# Altium PCB 20K Control Board V1.1.PcbDoc (part 11 of 24)
Units mm, origin at the board's own origin, x right, y up, seen from the top; angles counter-clockwise.
Board outline 132 x 260 mm, 4 copper layers (Top Layer, GND, VCC, Bottom Layer); 1384 components, 779 nets, 4515 pads, 1774 vias.
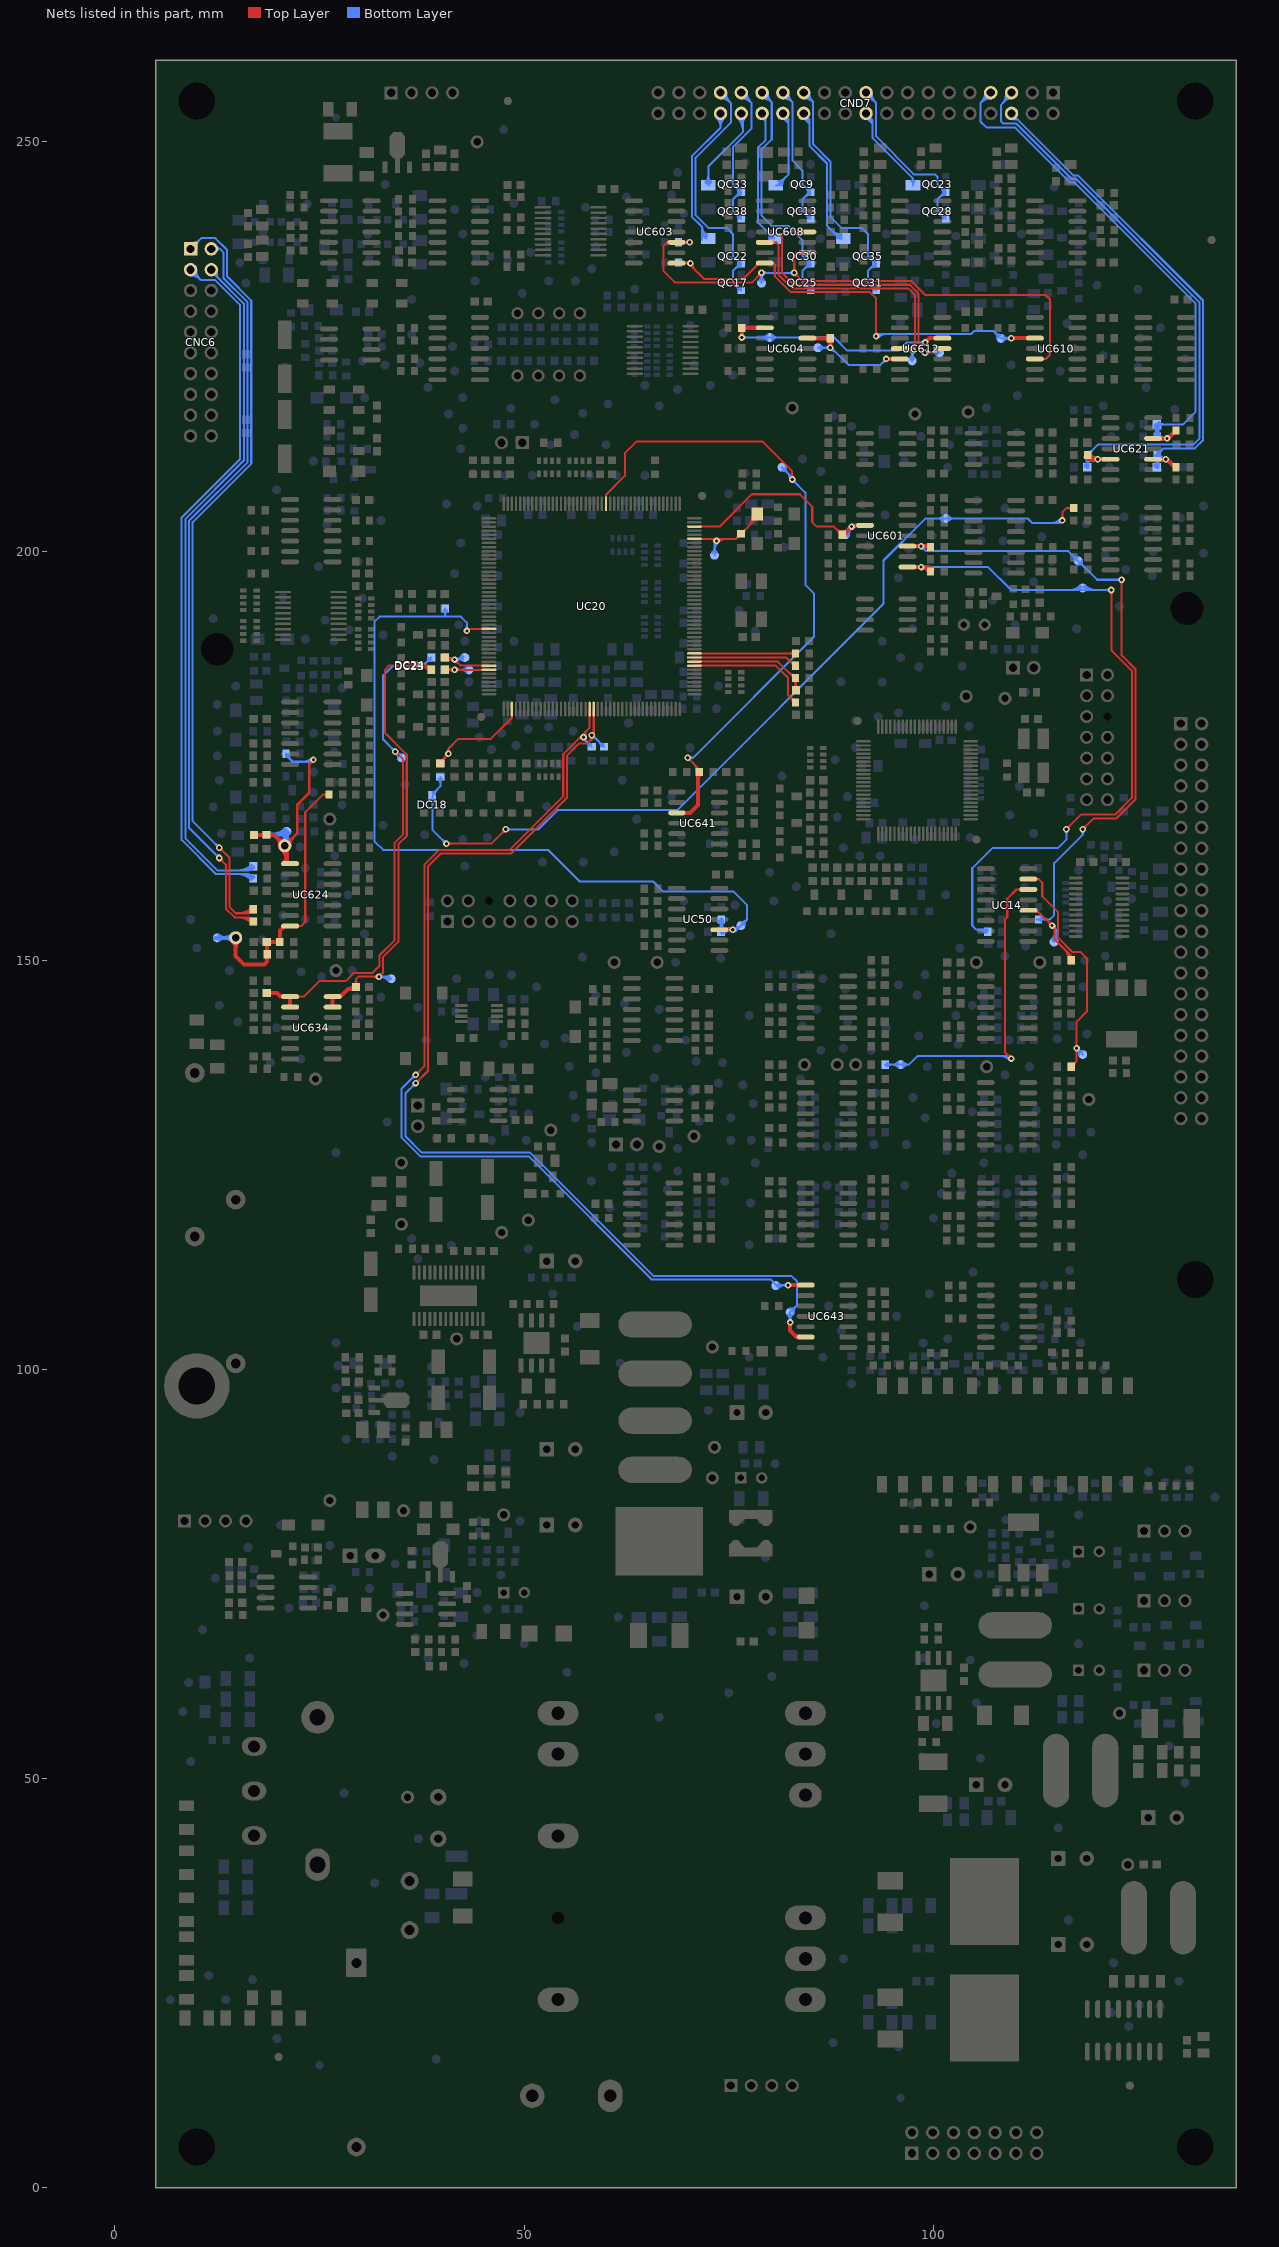
[diagram p13: the nets of this part, all layers, seen from the top]

## Via types
v1: diameter 0.8, hole 0.4, Top Layer to Bottom Layer, tented both sides, 1354 vias
v2: diameter 1.2, hole 0.7, Top Layer to Bottom Layer, 261 vias
v3: diameter 0.8, hole 0.4, Top Layer to Bottom Layer, 58 vias
v4: diameter 1.2, hole 0.7, Top Layer to Bottom Layer, tented top, 58 vias
v5: diameter 0.8, hole 0.4, Top Layer to Bottom Layer, tented top, 22 vias
v6: diameter 1.2, hole 0.7, Top Layer to Bottom Layer, tented both sides, 13 vias
v7: diameter 1.2, hole 0.7, Top Layer to Bottom Layer, tented bottom, 8 vias

## Nets (pads, with @x,y where several pads share a name; then routed paths per layer and width w, separated by ;. In a path a pad name is that pad's centre, name@x,y a point inside that pad or via, vN(x,y) a via of type N, cw(c..) or ccw(c..) an arc to the next point about the centre after c; other vN are vias at no path point) (continued)
INVBQ3_A: CND7.19 QC23.2 QC28.2 | length 30.5
  Bottom Layer w0.25: CND7.19@91.77,255.32 cw(c91.77,253.63) 92.965,254.825 cw(c94.16,256.02) CND7.19@92.47,256.02 ; CND7.19@91.77,255.57 cw(c91.77,254.484) 92.538,255.252 cw(c93.306,256.02) CND7.19@92.22,256.02 ; CND7.19@91.77,256.02 93,254.79 93,250.682 97.682,246 100.25,246 100.5,245.75 100.5,244.845 QC23.2@101.5,243.845 101.345,243.845 100.5,243 100.5,241.595 QC28.2@101.5,240.595 ; 100.668,243.168 cw(c101.5,242.337) QC23.2@101.5,243.513 ; 101.042,243.543 ccw(c100.74,243.845) 101.168,243.845 ccw(c100.366,243.845) 100.933,244.412 ccw(c101.5,244.979) QC23.2@101.5,244.177 ; QC23.2@101.095,243.595 cw(c101.5,243.19) QC23.2@101.5,243.763 ; QC28.2@101.168,240.595 ccw(c100.366,240.595) 100.933,241.162 ccw(c101.5,241.729) QC28.2@101.5,240.927
INVBQ3_K: CND7.20 RC376.2 | length 14.4
  Bottom Layer w0.25: CND7.20@91.77,253.029 92.55,252.249 ; CND7.20@91.77,253.279 92.55,252.499 ; CND7.20@91.77,253.344 CND7.20@91.77,253.48 92.55,252.7 92.55,252.499 ; RC376.2@97.267,245.171 ccw(c97.082,245.546) 97.5,245.546 ccw(c97.918,245.546) RC376.2@97.733,245.171 ; RC376.2@97.5,244.7 97.5,245.546 92.55,250.496 92.55,251.999 92.55,252.249 ; 92.55,252.249 92.55,252.499
INVBQ4_A: CND7.25 QC31.2 QC35.2 | length 38.6
  Bottom Layer w0.25: CND7.25@84.15,256.02 85.3,254.87 ; CND7.25@84.162,255.57 cw(c84.19,254.581) 84.889,255.281 cw(c85.589,255.98) CND7.25@84.6,256.008 ; CND7.25@84.169,255.32 cw(c84.212,253.782) 85.3,254.87 ; CND7.25@84.85,256.001 ccw(c86.388,255.958) 85.3,254.87 ; 92.168,234.418 cw(c93,233.587) QC35.2@93,234.763 ; 92.542,234.792 ccw(c92.24,235.095) 92.668,235.095 ccw(c91.866,235.095) 92.433,235.662 ccw(c93,236.229) QC35.2@93,235.427 ; QC35.2@92.595,234.845 cw(c93,234.44) QC35.2@93,235.013 ; QC31.2@92.668,231.845 ccw(c91.866,231.845) 92.433,232.412 ccw(c93,232.979) QC31.2@93,232.177 ; QC31.2@93,231.845 92,232.845 92,234.25 92.845,235.095 QC35.2@93,235.095 92,236.095 92,238.75 91.25,239.5 88.75,239.5 87.45,240.8 87.45,247.55 85.3,249.7 85.3,254.87
INVBQ4_K: CND7.26 RC387.2 | length 22.4
  Bottom Layer w0.25: CND7.26@84,253.099 84.85,252.249 ; CND7.26@84.15,253.199 84.85,252.499 ; CND7.26@84.15,253.48 84.85,252.78 84.85,252.499 ; 87.512,239.238 ccw(c88.75,240.475) RC387.2@88.75,238.725 ; 87.939,238.811 ccw(c88.75,239.622) RC387.2@88.75,238.475 ; 87.995,238.755 cw(c87.44,238.2) RC387.2@88.225,238.2 ; RC387.2@88.75,238.2 88.55,238.2 87,239.75 87,247.364 84.85,249.514 84.85,252.249 ; 84.85,252.249 84.85,252.499
INVC_S1: pad.ICT@79,232.75 RC308.1 UC603.10 UC608.9 UC610.5 | length 85.5
  Top Layer w0.25: 67.32,237.57 cw(c67.519,237.371) UC603.10@67.692,237.592 ; UC603.10@67.653,237.636 ccw(c67.48,237.525) 67.48,237.73 ; UC603.10@67.653,237.824 cw(c67.48,237.935) 67.48,237.73 ; UC603.10@69.524,237.606 cw(c69.822,237.308) 69.822,237.73 cw(c69.822,238.152) UC603.10@69.524,237.854 ; v1@70.036,237.536 ccw(c69.566,237.066) 69.566,237.73 ccw(c69.566,238.394) v1@70.036,237.924 ; v1(70.23,237.73) UC603.10@68.6,237.73 67.48,237.73 ; v1@78.725,234 cw(c78.061,234) 78.531,233.531 cw(c79,233.061) v1@79,233.725 ; v1(79,234) 77.8,232.8 68.45,232.8 67,234.25 67,237.25 67.48,237.73 ; v1@82.806,234.194 ccw(c82.336,234.664) 83,234.664 ccw(c83.664,234.664) v1@83.194,234.194 ; v1@83,233.725 cw(c83,233.061) 83.469,233.531 cw(c83.939,234) v1@83.275,234 ; UC608.9@83.676,236.336 ccw(c83.378,236.038) 83.378,236.46 ccw(c83.378,236.882) UC608.9@83.676,236.584 ; UC608.9@84.6,236.46 83.21,236.46 83,236.25 v1(83,234) 84,233 97.304,233 99.004,231.3 113.7,231.3 114.25,230.75 114.25,223.98 113.75,223.48 UC610.5@112.4,223.48 ; UC610.5@113.324,223.356 cw(c113.622,223.058) 113.622,223.48 cw(c113.622,223.902) UC610.5@113.324,223.604
  Bottom Layer w0.25: RC308.1@68.85,237.75 v1@70.21,237.75 ; RC308.1@69.08,237.52 cw(c69.635,236.965) 69.635,237.75 cw(c69.635,238.535) RC308.1@69.08,237.98 ; 69.518,237.75 cw(c69.518,237.018) v1@70.036,237.536 ; 69.614,237.75 ccw(c69.614,238.346) v1@70.036,237.924 ; pad.ICT@78.699,233.051 ccw(c77.974,233.776) 79,233.776 ccw(c80.026,233.776) pad.ICT@79.301,233.051 ; v1@78.806,233.806 cw(c78.336,233.336) 79,233.336 cw(c79.664,233.336) 79.194,233.806 cw(c79.664,233.336) 79.664,234 cw(c79.664,234.664) v1@79.194,234.194 ; pad.ICT@79,232.75 v1(79,234) v1(83,234) ; v1@82.806,233.806 ccw(c82.336,233.336) 82.336,234 ccw(c82.336,234.664) v1@82.806,234.194
INVC_S2: pad.ICT@85.9,224.85 RC318.1 UC604.12 UC612.5 | length 21.4
  Top Layer w0.5: UC604.12@84.62,226 RC318.1@87.4,226 v1(87.4,224.85) ; RC318.1@87.259,225.809 cw(c86.917,225.467) 87.4,225.467 cw(c87.883,225.467) RC318.1@87.541,225.809 ; RC318.1@87.259,225.859 ccw(c86.917,225.517) 86.917,226 ccw(c86.917,226.483) RC318.1@87.259,226.141 ; v1(94.25,223.48) UC612.5@95.9,223.48
  Bottom Layer w0.25: pad.ICT@85.9,224.85 v1(87.4,224.85) 87.525,224.85 89.625,222.75 93.52,222.75 v1(94.25,223.48) ; pad.ICT@86.201,224.549 cw(c86.926,223.824) 86.926,224.85 cw(c86.926,225.876) pad.ICT@86.201,225.151 ; v1@87.206,224.656 ccw(c86.736,224.186) 86.736,224.85 ccw(c86.736,225.514) v1@87.206,225.044 ; v1@87.4,224.575 cw(c87.4,223.609) 88.083,224.292 ; v1@87.675,224.85 ccw(c88.036,224.85) 87.781,224.594 ; v1@93.975,223.48 cw(c93.311,223.48) 93.781,223.011 cw(c94.25,222.541) v1@94.25,223.205
INVC_S3: pad.ICT@80,226.1 RC321.1 UC604.2 UC612.12 | length 36.5
  Top Layer w0.5: RC321.1@76.459,227.059 cw(c76.117,226.717) 76.6,226.717 cw(c77.083,226.717) RC321.1@76.741,227.059 ; v1(76.6,226.1) RC321.1@76.6,227.25 ; RC321.1@76.64,227.29 UC604.2@79.4,227.29 ; RC321.1@76.741,227.159 cw(c77.059,226.841) 77.059,227.29 ; RC321.1@76.741,227.441 ccw(c77.107,227.807) 77.107,227.29 ; v1(99,225.5) 99.52,226.02 UC612.12@101.1,226.02
  Bottom Layer w0.25: v1(76.6,226.1) 78.25,226.1 87.9,226.1 89.5,224.5 95.75,224.5 96.75,225.5 v1(99,225.5) ; v1@76.794,225.906 cw(c77.264,225.436) 77.264,226.1 cw(c77.264,226.764) v1@76.794,226.294 ; pad.ICT@79.699,225.799 ccw(c78.974,225.074) 78.974,226.1 ccw(c78.974,227.126) pad.ICT@79.699,226.401 ; pad.ICT@80.301,225.799 cw(c81.026,225.074) 81.026,226.1 cw(c81.026,227.126) pad.ICT@80.301,226.401 ; v1@98.806,225.306 ccw(c98.336,224.836) 98.336,225.5 ccw(c98.336,226.164) v1@98.806,225.694
INVC_S4: pad.ICT@108.25,226 RC315.1 UC603.8 UC608.7 UC610.3 | length 67.8
  Top Layer w0.25: UC603.8@68.6,235.19 v1(70.31,235.19) 70.31,234.94 72,233.25 76.75,233.25 UC608.7@78.69,235.19 ; UC603.8@69.524,235.066 cw(c69.822,234.768) 69.822,235.19 cw(c69.822,235.612) UC603.8@69.524,235.314 ; v1@70.116,234.996 ccw(c69.646,234.526) 69.646,235.19 ccw(c69.646,235.854) v1@70.116,235.384 ; v1@70.335,235.19 ccw(c70.999,235.19) 70.529,234.721 ; v1@70.585,235.19 ccw(c71.852,235.19) 70.956,234.294 ; 78.238,234.738 ccw(c77.785,235.19) UC608.7@78.425,235.19 ; UC608.7@79.4,235.19 80.428,235.19 80.618,235 80.618,233.609 82.577,231.65 92.25,231.65 93,230.9 v1(93,226.25) ; v1@92.806,226.444 ccw(c92.336,226.914) 93,226.914 ccw(c93.664,226.914) v1@93.194,226.444
  Top Layer w0.5: v1@109.5,226.02 UC610.3@112.4,226.02 ; v1@109.606,225.894 cw(c109.91,225.59) 109.91,226.02
  Bottom Layer w0.25: RC315.1@68.85,235.25 v1@70.25,235.25 ; RC315.1@69.08,235.02 cw(c69.635,234.465) 69.635,235.25 cw(c69.635,236.035) RC315.1@69.08,235.48 ; 69.501,235.25 cw(c69.501,234.381) v1@70.116,234.996 ; 69.791,235.25 ccw(c69.791,235.709) v1@70.116,235.384 ; v1(93,226.25) 93.275,226.525 104.625,226.525 105,226.9 107.35,226.9 pad.ICT@108.25,226 v1(109.5,226) ; v1@93.018,226.232 cw(c93.724,225.526) 93.724,226.525 ; v1@93.194,226.056 cw(c94.328,224.922) 94.328,226.525 ; pad.ICT@107.825,226 ccw(c106.799,226) 107.524,226.726 ccw(c108.25,227.451) pad.ICT@108.25,226.425 ; pad.ICT@108.551,225.699 cw(c109.276,224.974) 109.276,226 cw(c109.276,227.026) pad.ICT@108.551,226.301 ; v1@109.306,225.806 ccw(c108.836,225.336) 108.836,226 ccw(c108.836,226.664) v1@109.306,226.194
INVC_SS2: pad.ICT@97.4,223.25 UC608.5 UC612.4 | length 44.3
  Top Layer w0.25: UC608.5@79.4,237.73 80.77,237.73 81.068,237.432 81.068,233.795 81.55,233.314 ; UC608.5@80.324,237.606 cw(c80.622,237.308) 80.622,237.73 cw(c80.622,238.152) UC608.5@80.324,237.854 ; 81.2,233.664 81.55,233.314 ; UC612.4@95.9,224.75 UC612.4@96.75,224.75 ; UC612.4@96.638,224.708 ccw(c97.029,224.973) 97.029,224.5 ; UC612.4@96.724,224.577 cw(c96.772,224.222) 97.025,224.475 ; UC612.4@96.824,224.626 cw(c97.122,224.328) 97.122,224.75 cw(c97.122,225.172) UC612.4@96.824,224.874 ; UC612.4@96.845,224.848 ccw(c97.5,225.29) v1(97.5,224.5) ; UC612.4@96.875,224.75 ccw(c97.177,224.75) 96.963,224.537 ; 97.107,224.75 cw(c97.107,224.357) v1@97.477,224.491 ; v1@97.242,224.406 ccw(c96.75,224.227) UC612.4@96.75,224.75 ; v1@97.268,224.353 ccw(c97,224.183) 97,224.5 ; v1@97.268,224.647 cw(c97,224.817) 97,224.5 ; v1@97.52,224.515 cw(c97.837,224.766) 97.551,225.051 ; v1@97.716,224.67 cw(c98.059,224.941) 97.75,225.25 ; 81.55,233.314 82.764,232.1 96.932,232.1 97.75,231.282 97.75,225.25 ; UC612.4@96.75,224.75 97,224.5 ; UC612.4@96.75,224.75 97.25,224.75 97.5,225 ; 97,224.5 v1(97.5,224.5) ; v1(97.5,224.5) 97.75,224.75 97.75,225 ; 97.5,225 97.75,225.25 ; 97.5,225 97.75,225 ; 97.75,225 97.75,225.25
  Bottom Layer w0.25: pad.ICT@97.102,223.553 ccw(c96.175,224.5) v1(97.5,224.5) 97.5,223.35 pad.ICT@97.4,223.25 ; pad.ICT@97.277,223.375 ccw(c96.758,223.905) 97.5,223.905 ; v1@97.306,224.306 cw(c96.836,223.836) 97.5,223.836 cw(c98.164,223.836) v1@97.694,224.306 ; 97.5,224.035 ccw(c98.185,224.035) pad.ICT@97.701,223.551
INVC_SS3: pad.ICT@100.75,224.25 UC608.11 UC612.11 | length 43.3
  Top Layer w0.25: UC608.11@83.676,238.876 ccw(c83.378,238.578) 83.378,239 ccw(c83.378,239.422) UC608.11@83.676,239.124 ; UC608.11@84.6,239 82,239 81.518,238.518 81.518,233.982 82.95,232.55 97.118,232.55 98.2,231.468 98.2,225.025 v1(98.975,224.25) 99.75,224.25 100.25,224.75 UC612.11@101.1,224.75 ; v1@98.7,224.25 ccw(c98.036,224.25) 98.505,224.719 ccw(c98.975,225.189) v1@98.975,224.525 ; v1@99.169,224.056 cw(c99.639,223.586) 99.639,224.25 cw(c99.639,224.914) v1@99.169,224.444 ; 99.916,224.416 cw(c100.3,224.032) UC612.11@100.3,224.575 ; 100.037,224.537 ccw(c99.823,224.75) UC612.11@100.125,224.75
  Bottom Layer w0.25: v1(98.975,224.25) pad.ICT@100.75,224.25 ; v1@99.169,224.056 cw(c99.639,223.586) 99.639,224.25 cw(c99.639,224.914) v1@99.169,224.444 ; pad.ICT@100.449,223.949 ccw(c99.724,223.224) 99.724,224.25 ccw(c99.724,225.276) pad.ICT@100.449,224.551
INVCQ1_A: CND7.27 QC9.2 QC13.2 | length 26.1
  Bottom Layer w0.25: CND7.27@81.61,256.02 82.76,254.87 ; CND7.27@81.622,255.57 cw(c81.65,254.581) 82.349,255.281 cw(c83.049,255.98) CND7.27@82.06,256.008 ; CND7.27@81.629,255.32 cw(c81.672,253.782) 82.76,254.87 ; CND7.27@82.31,256.001 ccw(c83.848,255.958) 82.76,254.87 ; 84.168,243.168 cw(c85,242.337) QC9.2@85,243.513 ; 84.542,243.543 ccw(c84.24,243.845) 84.668,243.845 ccw(c83.866,243.845) 84.433,244.412 ccw(c85,244.979) QC9.2@85,244.177 ; QC9.2@84.595,243.595 cw(c85,243.19) QC9.2@85,243.763 ; QC13.2@84.668,240.595 ccw(c83.866,240.595) 84.433,241.162 ccw(c85,241.729) QC13.2@85,240.927 ; QC13.2@85,240.595 84,241.595 84,243 84.845,243.845 QC9.2@85,243.845 84,244.845 84,246.5 82.76,247.74 82.76,249.75 82.76,254.87
INVCQ1_K: CND7.28 RC357.2 | length 14.6
  Bottom Layer w0.25: RC357.2@80.75,244.7 80.95,244.7 82.31,246.06 82.31,251.999 82.31,252.249 ; RC357.2@81,245.225 ccw(c81,246.372) 81.811,245.561 ; RC357.2@81.275,244.7 cw(c82.06,244.7) RC357.2@81.505,245.255 ; RC357.2@81.525,244.7 cw(c82.913,244.7) 81.932,245.682 ; CND7.28@81.61,252.949 82.31,252.249 ; CND7.28@81.61,253.14 82.31,252.44 82.31,252.249 ; CND7.28@81.61,253.48 82.31,252.78 82.31,252.249
INVCQ2_A: CND7.33 QC17.2 QC22.2 | length 39.6
  Bottom Layer w0.25: CND7.33@73.99,255.32 cw(c73.99,253.63) 75.185,254.825 cw(c76.38,256.02) CND7.33@74.69,256.02 ; CND7.33@73.99,255.57 cw(c73.99,254.484) 74.758,255.252 cw(c75.526,256.02) CND7.33@74.44,256.02 ; CND7.33@73.99,256.02 75.25,254.76 75.25,252.364 70.95,248.064 70.95,241.05 72.5,239.5 74.75,239.5 75.5,238.75 75.5,236.095 QC22.2@76.5,235.095 76.345,235.095 75.5,234.25 75.5,232.845 QC17.2@76.5,231.845 ; 75.668,234.418 cw(c76.5,233.587) QC22.2@76.5,234.763 ; 76.042,234.792 ccw(c75.74,235.095) 76.168,235.095 ccw(c75.366,235.095) 75.933,235.662 ccw(c76.5,236.229) QC22.2@76.5,235.427 ; QC22.2@76.095,234.845 cw(c76.5,234.44) QC22.2@76.5,235.013 ; QC17.2@76.168,231.845 ccw(c75.366,231.845) 75.933,232.412 ccw(c76.5,232.979) QC17.2@76.5,232.177
INVCQ2_K: CND7.34 RC370.2 | length 25
  Bottom Layer w0.25: RC370.2@71.75,238 71.75,239.608 ; 71.75,238.921 ccw(c72.483,238.921) RC370.2@72.258,238.224 ; 71.75,239.265 ccw(c72.594,239.265) RC370.2@72.334,238.462 ; RC370.2@72.411,238.7 cw(c72.704,239.608) 71.75,239.608 ; CND7.34@73.495,252.985 cw(c72.3,251.79) 73.99,251.79 cw(c75.68,251.79) CND7.34@74.485,252.985 ; CND7.34@73.672,253.162 cw(c72.904,252.394) 73.99,252.394 cw(c75.076,252.394) CND7.34@74.308,253.162 ; CND7.34@73.99,253.48 73.99,251.74 70.496,248.246 70.496,240.862 71.75,239.608
INVCQ3_A: CND7.29 QC25.2 QC30.2 | length 38.3
  Bottom Layer w0.25: CND7.29@79.07,256.02 80.25,254.84 ; CND7.29@79.074,255.57 cw(c79.084,254.516) 79.829,255.261 cw(c80.574,256.006) CND7.29@79.52,256.016 ; CND7.29@79.076,255.32 cw(c79.091,253.681) 80.25,254.84 ; CND7.29@79.77,256.014 ccw(c81.409,255.999) 80.25,254.84 ; 84.168,234.418 cw(c85,233.587) QC30.2@85,234.763 ; 84.542,234.792 ccw(c84.24,235.095) 84.668,235.095 ccw(c83.866,235.095) 84.433,235.662 ccw(c85,236.229) QC30.2@85,235.427 ; QC30.2@84.595,234.845 cw(c85,234.44) QC30.2@85,235.013 ; QC25.2@84.668,231.845 ccw(c83.866,231.845) 84.433,232.412 ccw(c85,232.979) QC25.2@85,232.177 ; QC25.2@85,231.845 84,232.845 84,234.25 84.845,235.095 QC30.2@85,235.095 84,236.095 84,238 82.25,239.75 80.25,239.75 79.013,240.987 79.013,249.079 80.25,250.316 80.25,254.84
INVCQ3_K: CND7.30 RC378.2 | length 20.1
  Bottom Layer w0.25: CND7.30@79.07,252.93 79.5,252.5 ; CND7.30@79.07,253.48 79.5,253.05 79.5,252.499 ; 79.568,239.182 cw(c78.587,238.2) RC378.2@79.975,238.2 ; 79.689,239.061 ccw(c80.5,239.872) RC378.2@80.5,238.725 ; RC378.2@79.995,238.755 cw(c79.44,238.2) RC378.2@80.225,238.2 ; RC378.2@80.55,238.2 78.563,240.187 78.563,249.265 79.5,250.202 79.5,252.249 ; 79.5,252.249 79.5,252.5 ; 79.5,252.249 79.5,252.499
INVCQ4_A: CND7.31 QC33.2 QC38.2 | length 26.8
  Bottom Layer w0.25: 75.668,243.168 cw(c76.5,242.337) QC33.2@76.5,243.513 ; 76.042,243.542 ccw(c75.74,243.845) 76.168,243.845 ccw(c75.366,243.845) 75.933,244.412 ccw(c76.5,244.979) QC33.2@76.5,244.177 ; QC33.2@76.095,243.595 cw(c76.5,243.19) QC33.2@76.5,243.763 ; QC38.2@76.168,240.595 ccw(c75.366,240.595) 75.933,241.162 ccw(c76.5,241.729) QC38.2@76.5,240.927 ; QC38.2@76.5,240.595 75.5,241.595 75.5,243 76.345,243.845 QC33.2@76.5,243.845 75.5,244.845 75.5,249.364 77.75,251.614 77.75,254.8 CND7.31@76.53,256.02 ; CND7.31@76.53,255.32 cw(c76.53,253.63) 77.725,254.825 cw(c78.92,256.02) CND7.31@77.23,256.02 ; CND7.31@76.53,255.57 cw(c76.53,254.484) 77.298,255.252 cw(c78.066,256.02) CND7.31@76.98,256.02
INVCQ4_K: CND7.32 RC389.2 | length 18.7
  Bottom Layer w0.25: RC389.2@72.129,245.071 ccw(c71.233,245.967) 72.5,245.967 ccw(c73.767,245.967) RC389.2@72.871,245.071 ; RC389.2@72.306,244.894 ccw(c71.836,245.364) 72.5,245.364 ccw(c73.164,245.364) RC389.2@72.694,244.894 ; RC389.2@72.5,244.7 72.5,247 76.75,251.25 76.75,253.26 CND7.32@76.53,253.48 ; CND7.32@76.035,252.985 cw(c74.309,251.259) 76.75,251.259 ; CND7.32@76.212,253.162 cw(c74.912,251.862) 76.75,251.862 ; CND7.32@76.389,253.339 cw(c75.516,252.466) 76.75,252.466 ; 76.75,252.321 cw(c77.689,252.321) CND7.32@77.025,252.985
INVR_TEMP: CC281.1 CND7.5 RC479.1 RC481.1 UC621.5 | length 84.7
  Top Layer w0.5: RC479.1@118.6,211.535 ccw(c119.166,211.908) 119.166,211.23 ; RC479.1@118.85,211.5 cw(c118.85,210.896) RC479.1@119.277,211.323 ; RC479.1@118.85,211.75 119.37,211.23 v1(120.095,211.23) ; RC479.1@119.017,211.81 ccw(c120.095,212.522) v1(120.095,211.23) ; UC621.5@121.65,211.23 v1(120.095,211.23)
  Bottom Layer w0.25: 108.36,254.61 ccw(c107.156,255.814) CND7.5@108.853,255.96 ; 108.731,254.981 cw(c109.55,254.161) CND7.5@109.55,255.32 ; 108.74,254.99 ccw(c107.856,255.874) CND7.5@109.102,255.981 ; CND7.5@109.55,256.02 109.55,255.8 108.25,254.5 108.25,252.523 108.523,252.25 110.144,252.25 116.921,245.473 117.459,245.473 132.5,230.432 132.5,213.75 131.75,213 120.1,213 RC481.1@118.85,211.75 ; RC481.1@118.85,212.125 ccw(c118.85,213.03) 119.49,212.39 ; RC481.1@119.175,211.8 cw(c119.839,211.8) 119.369,212.269
  Bottom Layer w0.5: RC481.1@118.6,211.535 ccw(c119.166,211.908) 119.166,211.23 ; CC281.1@118.623,210.427 ccw(c118.076,210.974) 118.85,210.974 ; RC481.1@118.709,211.559 cw(c118.367,211.217) 118.85,211.217 cw(c119.333,211.217) RC481.1@118.991,211.559 ; CC281.1@118.85,210.3 RC481.1@118.85,211.75 ; 118.87,211.23 v1(120.095,211.23) cw(c120.095,212.522) RC481.1@119.017,211.81
INVS_TEMP: CC284.1 CND7.6 RC488.1 RC491.1 UC621.10 | length 69.2
  Top Layer w0.5: UC621.10@126.6,211.23 UC621.10@126.85,211.23 v1(128.405,211.23) ; v1@128.405,211.08 cw(c128.405,210.44) 128.857,210.893 ; v1@128.52,211.23 129.5,210.25 RC488.1@129.65,210.25 ; 128.967,210.783 ccw(c129.65,211.466) RC488.1@129.65,210.5
  Bottom Layer w0.25: CND7.6@109.55,253.314 CND7.6@109.55,253.48 ; RC491.1@127.35,211.75 128.15,212.55 131.936,212.55 132.95,213.564 132.95,230.618 117.645,245.923 117.107,245.923 110.39,252.64 ; RC491.1@127.35,212.125 ccw(c127.35,213.03) 127.99,212.39 ; RC491.1@127.675,211.8 cw(c128.339,211.8) 127.869,212.269 ; CND7.6@109.55,253.48 110.39,252.64 ; CND7.6@109.55,253.48 109.55,252.95 109.75,252.75 110.28,252.75 110.39,252.64
  Bottom Layer w0.5: RC491.1@127.078,211.572 ccw(c127.618,211.826) 127.618,211.23 ; CC284.1@127.123,210.427 ccw(c126.576,210.974) 127.35,210.974 ; RC491.1@127.209,211.559 cw(c126.867,211.217) 127.35,211.217 cw(c127.833,211.217) RC491.1@127.491,211.559 ; CC284.1@127.35,210.3 RC491.1@127.35,211.75 ; RC491.1@127.531,211.785 ccw(c128.405,212.196) v1(128.405,211.23) 127.58,211.23
INVT_TEMP: CC289.1 CND7.7 RC497.1 RC499.1 UC621.12 | length 73.2
  Top Layer w0.5: UC621.12@126.6,213.77 UC621.12@126.85,213.77 v1(128.555,213.77) ; v1@128.555,213.92 ccw(c128.555,214.56) 129.007,214.107 ; v1@128.67,213.77 RC497.1@129.65,214.75 ; RC497.1@129.223,214.323 cw(c129.65,213.896) RC497.1@129.65,214.5
  Bottom Layer w0.25: CND7.7@106.31,256.02 cw(c104.62,256.02) 105.815,254.825 cw(c107.01,253.63) CND7.7@107.01,255.32 ; CND7.7@106.56,256.02 cw(c105.474,256.02) 106.242,255.252 cw(c107.01,254.484) CND7.7@107.01,255.57 ; CND7.7@107.01,256.02 105.75,254.76 105.75,252.5 106.5,251.75 110.007,251.75 116.735,245.023 117.273,245.023 132.05,230.245 132.05,217.05 130.45,215.45 CC289.1@127.35,215.45 ; CC289.1@127.565,215.235 cw(c128.085,214.715) 128.085,215.45 ; CC289.1@127.565,215.765 ccw(c128.326,216.526) 128.326,215.45
  Bottom Layer w0.5: CC289.1@127.123,215.323 cw(c126.576,214.776) 127.35,214.776 ; RC499.1@127.209,214.191 ccw(c126.867,214.533) 127.35,214.533 ccw(c127.833,214.533) RC499.1@127.491,214.191 ; CC289.1@127.35,215.45 RC499.1@127.35,214 127.58,213.77 v1(128.555,213.77) ; RC499.1@127.491,214.091 ccw(c128.267,214.867) v1@128.267,213.77
IPV1: CC446.1 DC23.3 pad.ICT@35,174.75 RC264.1 UC634.1 UC634.2 | length 72.6
  Top Layer w0.25: UC634.1@21.4,145.56 23.06,145.56 25,147.5 28.25,147.5 29.2,148.45 31.45,148.45 32.325,149.325 32.325,150.598 34.175,152.448 34.175,164.357 35.2,165.382 35.2,174.55 v1@34.5,175.25 ; UC634.1@22.324,145.436 cw(c22.622,145.138) 22.622,145.56 cw(c22.622,145.982) UC634.1@22.324,145.684 ; v1@34.25,175.225 cw(c34.25,174.561) 34.719,175.031 cw(c35.189,175.5) v1@34.525,175.5
  Top Layer w0.5: CC446.1@18.55,146 19.81,146 20.25,145.56 UC634.1@21.4,145.56 UC634.2@21.4,144.29 ; CC446.1@18.727,145.823 cw(c19.154,145.396) 19.154,146 cw(c19.154,146.604) CC446.1@18.727,146.177 ; 19.985,145.825 ccw(c20.515,146.355) UC634.1@20.595,145.61
  Bottom Layer w0.25: v1@33.975,175.5 ccw(c33.311,175.5) 33.781,175.969 ccw(c34.25,176.439) v1@34.25,175.775 ; v1@34.25,175.225 cw(c34.25,174.561) 34.719,175.031 cw(c35.189,175.5) v1@34.525,175.5 ; pad.ICT@34.575,174.75 ccw(c33.549,174.75) 34.274,175.476 ccw(c35,176.201) pad.ICT@35,175.175 ; pad.ICT@35,174.75 v1(34.25,175.5) 32.75,177 32.75,184.75 33.965,185.965 DC23.3@37.032,185.965 37.032,186.25 37.9,186.25 ; DC23.3@36.619,185.73 ccw(c36.052,185.163) 36.052,185.965 ccw(c36.052,186.767) DC23.3@36.619,186.2 ; DC23.3@37.291,185.956 cw(c37.62,185.919) DC23.3@37.62,186.25 ; DC23.3@37.54,185.928 cw(c37.9,185.888) 37.9,186.25 ; 38.01,186.36 cw(c38.65,185.72) RC264.1@38.65,186.625 ; 38.131,186.481 ccw(c37.661,186.95) RC264.1@38.325,186.95 ; RC264.1@38.65,187 37.9,186.25
IPV1+: CNC6.1 RC57.2 | length 106.9
  Top Layer w0.25: v1@12.75,163.475 cw(c12.75,162.811) 13.219,163.281 cw(c13.689,163.75) v1@13.025,163.75 ; v1(12.75,163.75) 14,162.5 14,156.5 14.75,155.75 16.4,155.75 RC57.2@16.9,156.25 ; 15.029,155.75 ccw(c15.029,158.071) RC57.2@16.67,156.43 ; 15.633,155.75 ccw(c15.633,157.467) RC57.2@16.847,156.253 ; 16.236,155.75 ccw(c16.236,156.864) RC57.2@17.024,156.076 ; 16.375,155.725 cw(c16.763,155.337) RC57.2@16.849,155.879 ; 16.381,155.731 ccw(c15.911,156.2) RC57.2@16.575,156.2
  Bottom Layer w0.25: CNC6.1@9.23,236.93 10.55,238.25 12.25,238.25 13.702,236.798 13.702,233.556 16.65,230.608 16.65,210.695 9.5,203.545 9.5,167 v1(12.75,163.75) ; CNC6.1@9.23,237.38 ccw(c9.23,238.466) 9.998,237.698 ccw(c10.766,236.93) CNC6.1@9.68,236.93 ; CNC6.1@9.23,237.63 ccw(c9.23,239.32) 10.425,238.125 ccw(c11.62,236.93) CNC6.1@9.93,236.93 ; v1@12.475,163.75 ccw(c11.811,163.75) 12.281,164.219 ccw(c12.75,164.689) v1@12.75,164.025
IPV1-: CNC6.2 RC69.2 | length 99.9
  Top Layer w0.25: v1@12.75,162.225 cw(c12.75,161.561) 13.219,162.031 cw(c13.689,162.5) v1@13.025,162.5 ; v1(12.75,162.5) 13.55,161.7 13.55,156.314 14.614,155.25 16.4,155.25 RC69.2@16.9,154.75 ; 15.029,155.25 cw(c15.029,152.929) RC69.2@16.67,154.57 ; 15.633,155.25 cw(c15.633,153.533) RC69.2@16.847,154.747 ; 16.236,155.25 cw(c16.236,154.136) RC69.2@17.024,154.924 ; RC69.2@16.576,154.822 ccw(c16.058,154.858) 16.425,155.225 ccw(c16.72,155.52) RC69.2@16.821,155.115
  Bottom Layer w0.25: CNC6.2@11.77,236.93 12.82,236.93 ; CNC6.2@12.416,236.661 cw(c12.82,236.493) 12.82,236.93 ; CNC6.2@12.416,237.199 ccw(c12.82,237.367) 12.82,236.93 ; v1@12.475,162.5 ccw(c11.811,162.5) 12.281,162.969 ccw(c12.75,163.439) v1@12.75,162.775 ; v1(12.75,162.5) 9.05,166.2 9.05,203.732 16.2,210.882 16.2,230.422 13.25,233.372 13.25,234.5 13.25,236.5 12.82,236.93
IPV1-P: CC39.1 pad.ICT@12.5,152.75 RC60.2 RC71.1 RC477.1 TP10.1 UC624.7 | length 47
  Top Layer w0.25: UC624.7@21.4,154.19 22.75,154.19 23.25,154.69 23.25,168.1 25.4,170.25 ; UC624.7@22.324,154.066 cw(c22.622,153.768) 22.622,154.19 cw(c22.622,154.612) UC624.7@22.324,154.314 ; RC477.1@25.913,170.028 ccw(c25.4,169.547) 25.4,170.25 ; RC477.1@25.913,170.472 cw(c25.4,170.953) 25.4,170.25 ; RC477.1@26.15,170.25 25.4,170.25
  Top Layer w0.5: TP10.1@14.361,152.361 cw(c13.422,151.422) 14.75,151.422 cw(c16.078,151.422) TP10.1@15.139,152.361 ; TP10.1@14.75,152.75 14.75,150.5 15.75,149.5 18.25,149.5 18.6,149.85 RC71.1@18.6,150.75 18.6,152.25 RC60.2@20.15,152.25 20.15,153.65 20.69,154.19 UC624.7@21.4,154.19 ; CC39.1@18.373,152.073 cw(c17.826,151.526) 18.6,151.526 ; RC71.1@18.459,150.559 cw(c18.117,150.217) 18.6,150.217 cw(c19.083,150.217) RC71.1@18.741,150.559 ; RC71.1@18.459,150.941 ccw(c18.117,151.283) 18.6,151.283 ccw(c19.083,151.283) RC71.1@18.741,150.941 ; CC39.1@18.727,152.073 cw(c19.154,151.646) 19.154,152.25 cw(c19.154,152.854) CC39.1@18.727,152.427 ; RC60.2@20.009,152.109 ccw(c19.667,151.767) 19.667,152.25 ccw(c19.667,152.733) RC60.2@20.009,152.391 ; RC60.2@20.009,152.441 ccw(c19.667,152.783) 20.15,152.783 ccw(c20.633,152.783) RC60.2@20.291,152.441
  Bottom Layer w0.5: pad.ICT@12.25,152.75 TP10.1@14.75,152.75 ; pad.ICT@12.712,152.538 cw(c13.224,152.026) 13.224,152.75 cw(c13.224,153.474) pad.ICT@12.712,152.962 ; TP10.1@14.361,152.361 ccw(c13.422,151.422) 13.422,152.75 ccw(c13.422,154.078) TP10.1@14.361,153.139
IPV1.AD: CC155.2 pad.ICT@42.75,187 RC264.2 UC20.37 | length 17
  Top Layer w0.25: CC155.2@40.3,186.75 v1(41.5,186.75) ; CC155.2@40.402,187.072 ccw(c41.02,187.504) 41.02,186.75 ; CC155.2@40.607,187.215 ccw(c41.5,187.839) v1(41.5,186.75) ; v1@41.306,186.556 ccw(c40.836,186.086) 40.836,186.75 ccw(c40.836,187.414) v1@41.306,186.944 ; v1@41.5,186.475 cw(c41.5,185.811) 41.969,186.281 cw(c42.439,186.75) v1@41.775,186.75 ; UC20.37@45.675,186.025 UC20.37@45.7,186 42.25,186 v1(41.5,186.75)
  Bottom Layer w0.25: RC264.2@40.407,186.999 ccw(c40.952,187.472) 40.952,186.75 ; RC264.2@40.596,187.163 ccw(c41.5,187.947) v1(41.5,186.75) ; RC264.2@40.6,186.75 v1(41.5,186.75) ; v1@41.306,186.556 ccw(c40.836,186.086) 40.836,186.75 ccw(c40.836,187.414) v1@41.306,186.944 ; v1@41.694,186.556 cw(c42.164,186.086) 42.164,186.75 cw(c42.164,187.414) v1@41.694,186.944 ; 41.963,186.75 ccw(c41.963,187.516) pad.ICT@42.604,187.096 ; pad.ICT@42.395,187.233 cw(c41.5,187.82) v1(41.5,186.75) ; pad.ICT@42.5,186.75 v1(41.5,186.75)
IPV2: CC448.1 DC24.3 pad.ICT@33.75,147.75 RC265.1 UC634.13 UC634.14 | length 71.6
  Top Layer w0.25: CC448.1@29.185,147.015 ccw(c28.545,147.655) 29.45,147.655 ccw(c30.355,147.655) CC448.1@29.715,147.015 ; CC448.1@29.45,146.5 CC448.1@29.45,146.75 29.45,147.7 29.75,148 v1(32.25,148) 32.775,148.525 32.775,150.411 34.625,152.261 34.625,164.171 35.65,165.196 35.65,175.125 33,177.775 33,185.5 33.535,186.035 DC24.3@37.032,186.035 ; v1@32.056,147.806 ccw(c31.586,147.336) 31.586,148 ccw(c31.586,148.664) v1@32.056,148.194 ; v1@32.25,148.275 ccw(c32.25,148.939) 32.719,148.469 ccw(c33.189,148) v1@32.525,148 ; DC24.3@36.619,185.8 ccw(c36.052,185.233) 36.052,186.035 ccw(c36.052,186.837) DC24.3@36.619,186.27 ; DC24.3@37.445,185.8 cw(c38.012,185.233) 38.012,186.035 cw(c38.012,186.837) DC24.3@37.445,186.27 ; DC24.3@37.532,186.035 cw(c37.532,184.713) RC265.1@38.59,185.505 ; 38.031,186.035 cw(c38.031,185.087) RC265.1@38.79,185.655 ; RC265.1@38.325,185.555 ccw(c37.694,185.563) 38.14,186.01 ccw(c38.499,186.369) RC265.1@38.591,185.87 ; RC265.1@38.39,185.355 ccw(c37.032,184.339) DC24.3@37.032,186.035 ; RC265.1@38.65,185.5 38.115,186.035 DC24.3@37.032,186.035
  Top Layer w0.5: UC634.13@26.6,144.29 UC634.14@26.6,145.56 27.56,145.56 28.5,146.5 ; UC634.14@27.4,145.61 ccw(c27.4,146.117) 27.758,145.758 ; CC448.1@29.244,146.892 cw(c28.5,147.402) 28.5,146.5 ; CC448.1@29.45,146.5 28.5,146.5
  Bottom Layer w0.25: v1@32.444,147.806 cw(c32.914,147.336) 32.914,148 cw(c32.914,148.664) v1@32.444,148.194 ; 32.806,148 cw(c32.806,146.913) pad.ICT@33.619,147.634 ; pad.ICT@33.432,147.468 ccw(c32.25,146.421) v1(32.25,148) 33.5,148 pad.ICT@33.75,147.75
IPV2+: CNC6.3 RC76.2 | length 95.7
  Bottom Layer w0.25: CNC6.3@9.23,233.69 cw(c9.23,232) 10.425,233.195 cw(c11.62,234.39) CNC6.3@9.93,234.39 ; CNC6.3@9.23,233.94 cw(c9.23,232.854) 9.998,233.622 cw(c10.766,234.39) CNC6.3@9.68,234.39 ; CNC6.3@9.23,234.39 10.52,233.1 12.249,233.1 15.3,230.049 15.3,211.254 8.15,204.104 8.15,164.714 12.314,160.55 16.35,160.55 RC76.2@16.9,160 ; 14.908,160.55 cw(c14.908,158.058) RC76.2@16.67,159.82 ; 15.512,160.55 cw(c15.512,158.662) RC76.2@16.847,159.997 ; 16.115,160.55 cw(c16.115,159.265) RC76.2@17.024,160.174
IPV2-: CNC6.4 RC87.2 | length 89.2
  Bottom Layer w0.25: CNC6.4@11.77,234.39 11.77,234.216 12.493,233.493 ; CNC6.4@12.36,234.39 12.493,234.257 12.493,233.493 ; 15.029,161 ccw(c15.029,163.321) RC87.2@16.67,161.68 ; 15.633,161 ccw(c15.633,162.717) RC87.2@16.847,161.503 ; 16.236,161 ccw(c16.236,162.114) RC87.2@17.024,161.326 ; RC87.2@16.9,161.5 16.4,161 12.5,161 8.6,164.9 8.6,203.918 15.75,211.068 15.75,230.236 12.493,233.493
IPV2-P: CC44.2 pad.ICT@21,165.75 RC79.2 RC88.1 RC480.1 TP12.1 UC624.1 | length 51.1
  Top Layer w0.3: TP12.1@20.75,164 22.25,165.5 22.25,169 23.75,170.5 23.75,174 v1(24.25,174.5) ; TP12.1@20.75,164.35 ccw(c20.75,165.195) 21.347,164.597 ccw(c21.945,164) TP12.1@21.1,164 ; TP12.1@20.75,164.65 ccw(c20.75,166.219) 21.86,165.11 ccw(c22.969,164) TP12.1@21.4,164 ; v1@24,174.5 cw(c23.396,174.5) 23.823,174.073 cw(c24.25,173.646) v1@24.25,174.25
  Top Layer w0.5: CC44.2@17.05,165.25 CC44.2@17,165.3 19.45,165.3 TP12.1@20.75,164 21,163.75 21,161.81 UC624.1@21.4,161.81 ; CC44.2@17.177,165.123 cw(c17.604,164.696) 17.604,165.3 cw(c17.604,165.904) CC44.2@17.177,165.477 ; 17.846,165.3 ccw(c17.846,165.954) RC88.1@18.309,165.491 ; RC88.1@18.691,165.491 ccw(c19.154,165.954) 19.154,165.3 ; TP12.1@20.2,164 ccw(c18.872,164) 19.811,164.939 ccw(c20.75,165.878) TP12.1@20.75,164.55 ; TP12.1@20.361,163.611 cw(c18.819,162.069) UC624.1@21,162.069 ; UC624.1@20.565,161.845 ccw(c19.514,162.896) 21,162.896
  Bottom Layer w0.3: RC480.1@20.9,174.9 cw(c20.9,174.417) RC480.1@21.241,174.759 ; RC480.1@20.9,175.25 20.9,175.1 21.75,174.25 24,174.25 v1(24.25,174.5) ; RC480.1@21.2,175.2 ccw(c22.166,175.2) 21.483,174.517 ; 23.043,174.25 ccw(c23.043,175.707) v1@24.073,174.677 ; 23.767,174.25 ccw(c23.767,174.983) v1@24.285,174.465
  Bottom Layer w0.5: RC79.2@18.5,165.35 20.6,165.35 ; RC79.2@18.691,165.209 cw(c19.033,164.867) 19.033,165.35 cw(c19.033,165.833) RC79.2@18.691,165.491 ; 19.31,165.35 ccw(c19.31,167.44) pad.ICT@20.788,165.962 ; TP12.1@20.39,164.416 ccw(c19.236,165.75) pad.ICT@21,165.75 ; 20.483,165.467 cw(c19.608,164.593) TP12.1@20.706,164.023 ; 20.517,165.35 ccw(c20.517,166.233) pad.ICT@21.141,165.609 ; TP12.1@20.75,164 21,164.25 pad.ICT@21,165.75 ; pad.ICT@20.788,165.538 cw(c20.276,165.026) 21,165.026 cw(c21.724,165.026) pad.ICT@21.212,165.538 ; 20.95,165 20.6,165.35 ; 20.965,164.985 cw(c20.244,164.263) TP12.1@21.149,163.793 ; 20.6,165.35 pad.ICT@21,165.75
IPV2.AD: CC156.2 pad.ICT@43.25,185.5 RC265.2 UC20.38 | length 18.7
  Top Layer w0.25: RC265.2@40.55,185.5 v1(41.5,185.5) ; RC265.2@40.58,185.27 cw(c41.135,184.715) 41.135,185.5 cw(c41.135,186.285) RC265.2@40.58,185.73 ; v1@41.25,185.5 UC20.38@45.7,185.5 ; v1@41.306,185.306 ccw(c40.836,184.836) 40.836,185.5 ccw(c40.836,186.164) v1@41.306,185.694 ; v1@41.694,185.306 cw(c42.164,184.836) 42.164,185.5 cw(c42.164,186.164) v1@41.694,185.694
  Bottom Layer w0.25: CC156.2@40.3,185.5 41,185.5 ; CC156.2@40.612,185.292 cw(c41,185.034) 41,185.5 ; CC156.2@40.612,185.708 ccw(c41,185.966) 41,185.5 ; v1@41.306,185.306 ccw(c40.836,184.836) 40.836,185.5 ccw(c40.836,186.164) v1@41.306,185.694 ; v1(41.5,185.5) 41,185.5 ; v1@41.694,185.306 cw(c42.164,184.836) 42.164,185.5 cw(c42.164,186.164) v1@41.694,185.694 ; pad.ICT@42.949,185.199 ccw(c42.224,184.474) 42.224,185.5 ccw(c42.224,186.526) pad.ICT@42.949,185.801 ; pad.ICT@43.25,185.5 41,185.5 ; 41,185.5 ccw(c41,185.817) v1@41.268,185.647 ; 41,185.5 cw(c41,185.183) v1@41.268,185.353 ; 41,185.5 ccw(c41,185.817) v1@41.268,185.647 ; 41,185.5 cw(c41,185.183) v1@41.268,185.353 ; 41,185.5 ccw(c41,185.817) v1@41.268,185.647 ; 41,185.5 cw(c41,185.183) v1@41.268,185.353
LOCK: CC48.1 pad.ICT@76.5,154.25 RC227.1 RC535.2 UC20.28 UC50.10 | length 109.9
  Top Layer w0.25: v1(43,190.25) 43.25,190.5 UC20.28@45.7,190.5
  Top Layer w0.5: UC50.10@73.85,153.73 v1(75.48,153.73)
  Bottom Layer w0.25: RC227.1@40.12,192.72 cw(c39.565,192.165) 40.35,192.165 cw(c41.135,192.165) RC227.1@40.58,192.72 ; RC227.1@40.35,193 40.35,192.1 40.25,192 ; v1@42.806,190.444 ccw(c42.336,190.914) 43,190.914 ccw(c43.664,190.914) v1@43.194,190.444 ; v1(43,190.25) 43,191.25 42.25,192 40.25,192 ; v1@75.422,153.513 ccw(c75.547,153.978) 75.887,153.637 ; v1(75.48,153.73) 75.98,153.73 ; v1@75.486,153.754 ccw(c75.676,154.462) pad.ICT@76.194,153.944 ; v1@75.551,153.996 ccw(c75.805,154.945) pad.ICT@76.5,154.25 ; v1@75.712,153.583 cw(c75.98,153.413) 75.98,153.73 ; v1@75.712,153.877 ccw(c75.98,154.047) 75.98,153.73 ; pad.ICT@76.5,154.675 ccw(c76.5,155.701) 77.226,154.976 ccw(c77.951,154.25) pad.ICT@76.925,154.25 ; 40.25,192 32.336,192 31.7,191.364 31.7,164.573 32.773,163.5 52.914,163.5 56.764,159.65 65.736,159.65 66.986,158.4 75.586,158.4 77.25,156.736 77.25,155 pad.ICT@76.5,154.25 ; 75.98,153.73 pad.ICT@76.5,154.25
  Bottom Layer w0.5: CC48.1@73.873,153.677 ccw(c73.326,154.224) 74.1,154.224 ; RC535.2@73.959,154.809 cw(c73.617,154.467) 74.1,154.467 cw(c74.583,154.467) RC535.2@74.241,154.809 ; CC48.1@74.1,153.55 RC535.2@74.1,155 ; CC48.1@74.227,153.323 cw(c75.209,152.341) v1@75.209,153.73 ; CC48.1@74.28,153.73 v1(75.48,153.73)
M-232-RX: pad.ICT@82.5,107 RC622.2 UC20.67 UC643.6 | length 148.5
  Top Layer w0.25: v1(36.75,135) 36.775,135 38.25,136.475 38.25,143.5 ; v1@36.75,135.275 ccw(c36.75,136) 37.263,135.487 ; v1@37.025,135 cw(c37.628,135) 37.202,135.426 ; 38.25,140.25 38.25,143.5 ; 58,176.75 ccw(c57.691,177.059) v1@58.034,177.33 ; v1@58.103,177.268 cw(c57.933,177) 58.25,177 ; 58.199,176.949 ccw(c57.913,177.234) v1@58.23,177.485 ; v1@58.397,177.268 ccw(c58.567,177) 58.25,177 ; v1@58.473,177.661 cw(c58.685,177.815) 58.5,178 ; v1@58.5,177.5 58.5,178 ; UC20.67@58.5,180.7 58.5,178 ; 38.25,143.5 38.25,161.477 39.823,163.05 48.436,163.05 55.225,169.839 55.225,175.018 56.707,176.5 57.75,176.5 58.25,177 ; 58.25,177 v1(58.25,177.5) 58.25,177.75 58.5,178
  Top Layer w0.5: v1(82.5,105.75) 82.5,104.75 83.29,103.96 UC643.6@84.4,103.96 ; 82.985,104.265 ccw(c83.6,104.879) UC643.6@83.6,104.01
  Bottom Layer w0.25: v1@36.475,135 cw(c35.811,135) 36.281,134.531 cw(c36.75,134.061) v1@36.75,134.725 ; v1(36.75,135) 35.5,133.75 35.5,128.5 37.5,126.5 50.727,126.5 65.777,111.45 82.65,111.45 83.35,110.75 83.35,107.85 pad.ICT@82.5,107 v1(82.5,105.75) ; v1@58.25,177.225 cw(c58.25,176.32) 58.89,176.96 ; v1(58.25,177.5) 58.35,177.5 RC622.2@59.75,176.1 ; v1@58.525,177.5 ccw(c58.947,177.5) 58.649,177.201 ; 59.11,176.74 cw(c58.47,176.1) RC622.2@59.375,176.1 ; 59.231,176.619 ccw(c59.7,177.089) RC622.2@59.7,176.425 ; pad.ICT@82.199,106.699 cw(c81.474,105.974) 82.5,105.974 cw(c83.526,105.974) pad.ICT@82.801,106.699 ; v1@82.306,105.944 ccw(c81.836,106.414) 82.5,106.414 ccw(c83.164,106.414) v1@82.694,105.944 ; pad.ICT@82.5,107.425 ccw(c82.5,108.451) 83.226,107.726 ccw(c83.951,107) pad.ICT@82.925,107
M-232-TX: pad.ICT@80.75,110.25 RC660.2 UC20.66 UC643.1 | length 141.7
  Top Layer w0.25: v1(36.75,136) 37.8,137.05 37.8,147.25 ; v1@36.75,136.275 ccw(c36.75,136.939) 37.219,136.469 ccw(c37.689,136) v1@37.025,136 ; 37.8,143 37.8,147.25 ; 56.698,177.127 cw(c57.042,176.782) v1@57.24,177.227 ; v1@56.987,177.33 cw(c56.655,177.431) 56.655,177.084 ; v1@57.181,177.516 ccw(c57.073,177.929) 57.5,177.929 ; v1@57.244,177.274 ccw(c57.157,177.606) 57.5,177.606 ; v1@57.27,177.265 cw(c57.547,177.48) 57.299,177.728 ; v1@57.468,177.418 cw(c57.774,177.655) 57.5,177.929 ; UC20.66@58,180.7 58,178.429 57.5,177.929 ; 37.8,147.25 37.8,161.664 39.636,163.5 48.25,163.5 54.775,170.025 54.775,175.204 56.655,177.084 ; 56.655,177.084 57.5,177.929 ; 56.655,177.084 57.084,177.084 v1(57.25,177.25) 57.5,177.5 57.5,177.929
  Top Layer w0.5: v1(82.25,110.31) UC643.1@84.4,110.31
  Bottom Layer w0.25: 36.237,135.513 cw(c36.75,135) v1@36.75,135.725 ; 36.298,135.574 ccw(c35.872,136) v1@36.475,136 ; v1(36.75,136) 36.725,136 35,134.275 35,128.364 37.314,126.05 50.541,126.05 65.591,111 80.12,111 80.81,110.31 v1(82.25,110.31) ; v1@57.25,176.975 cw(c57.25,176.673) 57.463,176.887 ; v1(57.25,177.25) 57.25,177.1 RC660.2@58.25,176.1 ; v1@57.525,177.25 ccw(c58.551,177.25) RC660.2@57.826,176.524 ; 57.61,176.74 cw(c56.97,176.1) RC660.2@57.875,176.1 ; 57.731,176.619 ccw(c58.2,177.089) RC660.2@58.2,176.425 ; pad.ICT@80.874,110.126 cw(c81.317,109.683) 81.317,110.31 ; pad.ICT@81.051,109.949 cw(c81.921,109.079) v1@81.921,110.31 ; pad.ICT@81.051,110.551 ccw(c81.631,111.131) 81.631,110.31 ; v1@82.056,110.116 ccw(c81.586,109.646) 81.586,110.31 ccw(c81.586,110.974) v1@82.056,110.504
M-SEL_A: pad.ICT@118.25,195.5 RC172.2 RC245.1 UC601.8 | length 101.6
  Top Layer w0.25: v1@116.25,166.025 118.025,167.8 122.186,167.8 124.248,169.862 124.248,171 ; v1@116.25,166.275 ccw(c116.25,166.878) 116.676,166.452 ; v1@116.525,166 cw(c117.25,166) 116.737,166.513 ; v1@121.556,195.056 cw(c121.086,194.586) 121.75,194.586 cw(c122.414,194.586) v1@121.944,195.056 ; v1(121.75,195.25) 121.75,187.886 124.248,185.388 124.248,184.25 ; 124.25,171 124.25,184.25
  Top Layer w0.5: UC601.8@97.435,198.065 UC601.8@96.85,198.065 96.865,198.05 v1(98.5,198.05) ; v1@98.559,197.912 cw(c98.86,197.21) RC245.1@99.4,197.75 ; RC245.1@99.223,197.927 ccw(c99.65,198.354) RC245.1@99.65,197.75 ; 99.321,198.05 cw(c99.321,197.38) RC245.1@99.916,197.688 ; RC245.1@99.472,197.458 ccw(c98.5,196.955) v1(98.5,198.05) ; RC245.1@99.65,197.5 99.1,198.05 v1(98.5,198.05)
  Bottom Layer w0.25: v1(98.5,198.05) 106.7,198.05 109.5,195.25 v1(121.75,195.25) ; 105.383,153.75 cw(c105.383,152.283) RC172.2@106.42,153.32 ; 105.986,153.75 cw(c105.986,152.886) RC172.2@106.597,153.497 ; RC172.2@106.65,153.75 105.25,153.75 104.75,154.25 104.75,161.25 107.25,163.75 115.25,163.75 116.25,164.75 v1(116.25,166) ; v1@116.056,165.806 cw(c115.586,165.336) 116.25,165.336 cw(c116.914,165.336) v1@116.444,165.806 ; 116.62,195.25 ccw(c116.62,197.13) pad.ICT@117.949,195.801 ; 117.224,195.25 ccw(c117.224,196.526) pad.ICT@118.126,195.624 ; pad.ICT@118.374,195.624 ccw(c119.276,196.526) 119.276,195.25 ; pad.ICT@118.551,195.801 ccw(c119.88,197.13) 119.88,195.25 ; v1@121.556,195.056 ccw(c121.086,194.586) 121.086,195.25 ccw(c121.086,195.914) v1@121.556,195.444
M-SEL_B: pad.ICT@117.685,198.815 RC176.2 RC251.1 UC601.10 | length 89
  Top Layer w0.25: v1(118.25,166) 118.25,166.025 119.575,167.35 122.373,167.35 124.698,169.675 124.698,170.75 ; v1@118.25,166.275 ccw(c118.25,166.878) 118.676,166.452 ; v1@118.525,166 cw(c119.25,166) 118.737,166.513 ; v1@122.806,196.306 cw(c122.336,195.836) 123,195.836 cw(c123.664,195.836) v1@123.194,196.306 ; v1(123,196.5) 123,187.273 124.7,185.573 124.7,170.75
  Top Layer w0.5: UC601.10@96.85,200.605 v1(98.5,200.605) RC251.1@99.65,200.605 ; 99.034,200.605 cw(c99.034,199.934) RC251.1@99.509,200.409
  Bottom Layer w0.25: v1@98.5,200.33 cw(c98.5,199.666) 98.969,200.136 cw(c99.439,200.605) v1@98.775,200.605 ; v1(98.5,200.605) 99.105,200 116.5,200 120,196.5 v1(123,196.5) ; RC176.2@112.6,155 RC176.2@112.85,155 114.25,155 114.75,155.5 114.75,161.864 118.25,165.364 ; RC176.2@113.08,154.77 cw(c113.635,154.215) 113.635,155 cw(c113.635,155.785) RC176.2@113.08,155.23 ; pad.ICT@117.26,198.815 ccw(c116.234,198.815) 116.959,199.541 ccw(c117.685,200.266) pad.ICT@117.685,199.24 ; pad.ICT@117.685,198.39 cw(c117.685,197.364) 118.41,198.09 cw(c119.136,198.815) pad.ICT@118.11,198.815 ; v1@118.062,165.8 cw(c117.651,165.364) 118.25,165.364 ; v1(118.25,166) 118.25,165.364 ; v1@118.438,165.8 ccw(c118.849,165.364) 118.25,165.364 ; v1@122.806,196.306 ccw(c122.336,195.836) 122.336,196.5 ccw(c122.336,197.164) v1@122.806,196.694
M-SPICLK: RC677.2 UC20.98 | length 14.4
  Top Layer w0.25: UC20.98@70.8,187 82,187 RC677.2@83,186 ; 82.254,186.746 ccw(c83.15,187.642) RC677.2@83.15,186.375 ; 82.681,186.319 ccw(c83.15,186.789) RC677.2@83.15,186.125 ; RC677.2@82.737,186.263 cw(c82.523,186.05) RC677.2@82.825,186.05
M-SPISIMO: RC681.2 UC20.96 | length 16.7
  Top Layer w0.25: UC20.96@70.8,186 80.75,186 82.25,184.5 82.25,182.4 RC681.2@83.15,181.5 ; 82.51,182.14 ccw(c83.15,182.78) RC681.2@83.15,181.875 ; 82.631,182.019 cw(c82.161,181.55) RC681.2@82.825,181.55
M-SPISOMI: CC135.2 RC221.1 UC20.97 | length 19
  Top Layer w0.25: UC20.97@70.8,186.5 81,186.5 83.15,184.35 CC135.2@83.15,183 ; 82.254,185.246 ccw(c83.15,186.142) RC221.1@83.15,184.875 ; 82.681,184.819 ccw(c83.15,185.289) RC221.1@83.15,184.625 ; RC221.1@82.737,184.763 cw(c82.523,184.55) RC221.1@82.825,184.55 ; RC221.1@82.92,184.22 cw(c82.365,183.665) 83.15,183.665 cw(c83.935,183.665) RC221.1@83.38,184.22 ; CC135.2@82.935,183.265 ccw(c82.415,183.785) 83.15,183.785 ; RC221.1@83.15,184.026 ccw(c84.226,184.026) CC135.2@83.465,183.265
M-SPISTE: RC672.2 UC20.99 | length 13.6
  Top Layer w0.25: UC20.99@70.8,187.5 RC672.2@83.15,187.5 ; RC672.2@82.92,187.27 ccw(c82.365,186.715) 82.365,187.5 ccw(c82.365,188.285) RC672.2@82.92,187.73
M.50MA.ON: pad.ICT@89.25,202 RC239.2 UC20.130 UC601.3 | length 31.1
  Top Layer w0.25: UC20.130@70.8,203 73.864,203 77.814,206.95 83.686,206.95 85.2,205.436 85.2,203.55 85.75,203 87.85,203 RC239.2@88.85,202 ; 88.21,202.64 ccw(c88.85,203.28) RC239.2@88.85,202.375 ; 88.331,202.519 cw(c87.861,202.05) RC239.2@88.525,202.05
  Top Layer w0.5: RC239.2@88.85,202.25 ccw(c88.85,203.216) 89.533,202.533 ; RC239.2@89,202 v1(90,203) 90.145,203.145 UC601.3@91.65,203.145 ; v1@90.106,202.894 cw(c90.712,202.288) UC601.3@90.712,203.145
  Bottom Layer w0.5: pad.ICT@89,202 v1(90,203) ; pad.ICT@89.55,202 cw(c90.878,202) v1@89.939,202.939
M.AUX.SHUT: DC37.1 pad.ICT@73.25,199.5 RC148.2 UC20.127 | length 24.9
  Top Layer w0.25: UC20.127@70.8,201.5 75.9,201.5 RC148.2@76.5,202.1 78.95,204.55 DC37.1@79,204.55 ; 73,201.5 73.25,201.25 v1(73.5,201.25) 73.75,201.25 74,201.5 cw(c73.815,201.685) v1@73.661,201.473 ; v1@73.518,201.232 cw(c74.164,200.586) 74.164,201.5 ; v1@73.694,201.056 cw(c74.767,199.983) 74.767,201.5 ; 75.925,201.525 ccw(c75.434,202.016) RC148.2@76.126,202.073 ; 75.981,201.581 cw(c76.45,201.111) RC148.2@76.45,201.775 ; RC148.2@76.55,202.425 ccw(c76.55,203.089) 77.019,202.619 ; RC148.2@76.875,202.1 cw(c77.78,202.1) 77.14,202.74 ; 77.271,202.871 ccw(c75.692,204.45) DC37.1@77.925,204.45 ; 77.698,203.298 ccw(c76.545,204.45) DC37.1@78.175,204.45 ; 78.116,203.716 cw(c78.5,203.332) DC37.1@78.5,203.875 ; 78.124,203.724 ccw(c77.399,204.45) DC37.1@78.425,204.45
  Bottom Layer w0.25: pad.ICT@72.949,199.801 ccw(c72.224,200.526) 73.25,200.526 ccw(c74.276,200.526) pad.ICT@73.551,199.801 ; pad.ICT@73.25,199.5 73.25,201 v1(73.5,201.25) ; pad.ICT@73.25,199.983 cw(c74.767,199.983) v1@73.694,201.056 ; 73.25,200.586 cw(c74.164,200.586) v1@73.518,201.232
M.DCI-R: pad.ICT@114.75,152.25 RC52.1 UC14.12 | length 21.3
  Top Layer w0.25: UC14.12@111.6,156.115 112.635,156.115 114.795,153.955 114.795,152.569 116.75,150.614 ; UC14.12@112.4,155.94 cw(c112.4,154.95) 113.1,155.65 ; v1@114.225,154.25 ccw(c113.561,154.25) 114.031,154.719 ccw(c114.5,155.189) v1@114.5,154.525 ; 115.967,151.396 cw(c114.621,150.05) RC52.1@116.525,150.05 ; 116.394,150.969 cw(c115.475,150.05) RC52.1@116.775,150.05 ; 116.518,150.845 cw(c116.173,150.5) RC52.1@116.579,150.23 ; RC52.1@116.62,150.28 ccw(c116.307,150.593) 116.75,150.593 ; 116.734,150.63 cw(c116.432,150.328) RC52.1@116.788,150.092 ; 116.821,150.543 cw(c116.328,150.05) RC52.1@117.025,150.05 ; RC52.1@116.85,150 116.75,150.1 116.75,150.614 ; RC52.1@116.939,150.362 cw(c117.011,150.614) 116.75,150.614
  Bottom Layer w0.25: pad.ICT@114.468,152.568 ccw(c113.421,153.75) 115,153.75 ; v1@114.5,153.975 cw(c114.5,153.311) 114.969,153.781 cw(c115.439,154.25) v1@114.775,154.25 ; v1(114.5,154.25) 115,153.75 115,152.5 pad.ICT@114.75,152.25 ; pad.ICT@114.634,152.381 ccw(c113.913,153.194) 115,153.194
M.DCI-R/S/T: DC18.3 pad.ICT@101.5,204 RC166.2 RC240.1 | length 122.4
  Top Layer w0.25: v1(40.5,164.25) 46,164.25 v1(47.75,166) ; v1@40.694,164.056 cw(c41.164,163.586) 41.164,164.25 cw(c41.164,164.914) v1@40.694,164.444 ; v1@47.475,166 cw(c46.811,166) 47.281,165.531 cw(c47.75,165.061) v1@47.75,165.725 ; v1@115.556,203.944 ccw(c115.086,204.414) 115.75,204.414 ccw(c116.414,204.414) v1@115.944,203.944 ; v1(115.75,203.75) 115.75,204.75 116.25,205.25 RC166.2@117.15,205.25 ; RC166.2@116.92,205.02 ccw(c116.365,204.465) 116.365,205.25 ccw(c116.365,206.035) RC166.2@116.92,205.48
  Bottom Layer w0.25: DC18.3@38.55,169.619 cw(c37.983,169.052) 38.785,169.052 cw(c39.587,169.052) DC18.3@39.02,169.619 ; DC18.3@38.785,170.032 38.785,165.965 v1(40.5,164.25) ; DC18.3@38.785,170.285 39.75,171.25 RC240.1@39.75,172.4 ; DC18.3@38.785,170.542 ccw(c38.785,171.163) 39.224,170.724 ; DC18.3@39.117,170.21 cw(c40.1,170.21) 39.405,170.905 ; RC240.1@39.52,172.17 cw(c38.965,171.615) 39.75,171.615 cw(c40.535,171.615) RC240.1@39.98,172.17 ; v1@40.225,164.25 ccw(c39.561,164.25) 40.031,164.719 ccw(c40.5,165.189) v1@40.5,164.525 ; v1(47.75,166) 51.75,166 54.1,168.35 68.694,168.35 93.9,193.556 93.9,198.852 98.9,203.852 99.048,204 111.5,204 112.05,203.45 115.45,203.45 v1(115.75,203.75) ; v1@47.944,165.806 cw(c48.414,165.336) 48.414,166 cw(c48.414,166.664) v1@47.944,166.194 ; pad.ICT@101.199,203.699 ccw(c100.474,202.974) 100.474,204 ccw(c100.474,205.026) pad.ICT@101.199,204.301 ; pad.ICT@101.801,203.699 cw(c102.526,202.974) 102.526,204 cw(c102.526,205.026) pad.ICT@101.801,204.301 ; 114.362,203.45 ccw(c114.362,205.138) v1@115.556,203.944 ; 114.965,203.45 ccw(c114.965,204.535) v1@115.732,203.768
M.DCI-R/S/T.AD: CC148.2 RC240.2 UC20.47 | length 21
  Top Layer w0.25: CC148.2@39.75,174.425 ccw(c39.75,174.847) CC148.2@40.049,174.549 ; CC148.2@39.76,174.067 CC148.2@39.809,174.067 ; CC148.2@39.817,174.067 39.817,174.317 v1(40.75,175.25) 40.75,175.864 ; CC148.2@39.875,174.05 cw(c40.66,174.05) 40.105,174.605 ; CC148.2@40.125,174.05 cw(c41.513,174.05) v1@40.532,175.032 ; v1@40.475,175.25 cw(c39.811,175.25) 40.281,174.781 cw(c40.75,174.311) v1@40.75,174.975 ; v1@40.567,175.455 ccw(c40.203,175.864) 40.75,175.864 ; v1@40.933,175.455 cw(c41.297,175.864) 40.75,175.864 ; UC20.47@48.475,180.675 UC20.47@48.5,180.7 48.5,179.614 45.936,177.05 42.55,177.05 41.936,177.05 40.75,175.864
  Bottom Layer w0.25: RC240.2@39.75,174.1 39.75,174.25 v1(40.75,175.25) ; RC240.2@39.8,174.425 ccw(c39.8,174.727) RC240.2@40.013,174.513 ; RC240.2@39.875,174.1 cw(c40.539,174.1) 40.069,174.569 ; RC240.2@40.125,174.1 cw(c41.392,174.1) v1@40.496,174.996 ; v1@40.475,175.25 cw(c39.811,175.25) 40.281,174.781 cw(c40.75,174.311) v1@40.75,174.975
M.DCI-S: pad.ICT@96,137.25 RC127.1 UC14.14 | length 49.1
  Top Layer w0.25: 109.025,138.475 v1(109.5,138) 108.75,138.75 108.75,155 109.025,155.275 109.025,157.525 110.155,158.655 UC14.14@111.6,158.655 ; UC14.14@110.676,158.531 ccw(c110.378,158.233) 110.378,158.655 ccw(c110.378,159.077) UC14.14@110.676,158.779 ; 109.031,138.469 ccw(c109.5,138.939) 109.5,138.275 cw(c109.5,138.939) 109.031,138.469 ; 109.031,138.469 cw(c108.561,138) 109.225,138 ccw(c108.561,138) 109.031,138.469
  Bottom Layer w0.25: RC127.1@94.175,137.175 RC127.1@94.1,137.25 97,137.25 ; RC127.1@94.33,137.02 cw(c94.885,136.465) 94.885,137.25 cw(c94.885,138.035) RC127.1@94.33,137.48 ; pad.ICT@95.699,136.949 ccw(c94.974,136.224) 94.974,137.25 ccw(c94.974,138.276) pad.ICT@95.699,137.551 ; pad.ICT@96.306,136.955 cw(c97,136.286) 97,137.25 ; pad.ICT@96.306,137.545 ccw(c97,138.214) 97,137.25 ; 108.112,138.3 cw(c108.112,136.612) v1@109.306,137.806 ; 108.715,138.3 cw(c108.715,137.215) v1@109.482,137.982 ; v1(109.5,138) 109.2,138.3 98.05,138.3 97,137.25
M.DCI-T: pad.1@118.25,138.5 RC50.1 UC14.15 | length 32.6
  Top Layer w0.25: UC14.15@111.6,159.925 112.875,159.925 113.3,159.5 113.3,157.818 115.245,155.873 115.245,152.755 117,151 118,151 118.75,150.25 118.75,143.75 117.5,142.5 117.5,137.65 RC50.1@116.85,137 ; UC14.15@112.524,159.801 cw(c112.822,159.503) 112.822,159.925 cw(c112.822,160.347) UC14.15@112.524,160.049 ; RC50.1@116.85,137.375 ccw(c116.85,138.28) 117.49,137.64 ; RC50.1@117.175,137.05 cw(c117.839,137.05) 117.369,137.519
  Bottom Layer w0.25: v1(117.5,139.25) pad.1@118.25,138.5 ; pad.1@117.825,138.5 ccw(c116.799,138.5) 117.524,139.226 ccw(c118.25,139.951) pad.1@118.25,138.925
M.DSP_RDY: pad.ICT@81.5,210.25 RC268.2 UC20.151 UC641.3 | length 95.9
  Top Layer w0.25: UC20.151@60,205.8 60,206.886 62.301,209.187 62.301,209.75 62.301,211.937 63.764,213.4 79.1,213.4 82.75,209.75 v1(82.75,208.75) ; v1@70,174.475 cw(c70,173.811) 70.469,174.281 cw(c70.939,174.75) v1@70.275,174.75 ; v1(70,174.75) 71.4,173.35 RC268.2@71.4,173 ; 70.633,174.117 cw(c69.566,173.05) RC268.2@71.075,173.05 ; 71.06,173.69 cw(c70.42,173.05) RC268.2@71.325,173.05 ; 82.75,209.414 ccw(c83.414,209.414) 82.944,208.944 cw(c83.414,209.414) 82.75,209.414 ; 82.75,209.414 cw(c82.086,209.414) 82.556,208.944 ccw(c82.086,209.414) 82.75,209.414
  Top Layer w0.5: UC641.3@68.65,168.02 70.27,168.02 71.25,169 RC268.2@71.25,173 ; 71.25,172.105 cw(c72.245,172.105) RC268.2@71.541,172.809
  Bottom Layer w0.25: v1(70,174.75) 70.639,174.75 ; v1@70.2,174.561 cw(c70.639,174.145) 70.639,174.75 ; v1@70.2,174.939 ccw(c70.639,175.355) 70.639,174.75 ; pad.ICT@81.5,209.825 cw(c81.5,208.799) 82.226,209.524 cw(c82.951,210.25) pad.ICT@81.925,210.25 ; pad.ICT@81.5,210.25 82.75,209 v1(82.75,208.75) 84.35,207.15 84.35,195.877 85.4,194.827 85.4,189.511 70.639,174.75 ; 82.104,209.646 cw(c81.208,208.75) v1@82.475,208.75 ; 82.531,209.219 cw(c82.061,208.75) v1@82.725,208.75 ; 83.219,208.281 ccw(c82.75,207.811) 82.75,208.475 cw(c82.75,207.811) 83.219,208.281 ; 83.219,208.281 cw(c83.689,208.75) 83.025,208.75 ccw(c83.689,208.75) 83.219,208.281